# EAGLE board Two stage power demo (EAGLE 5.10)
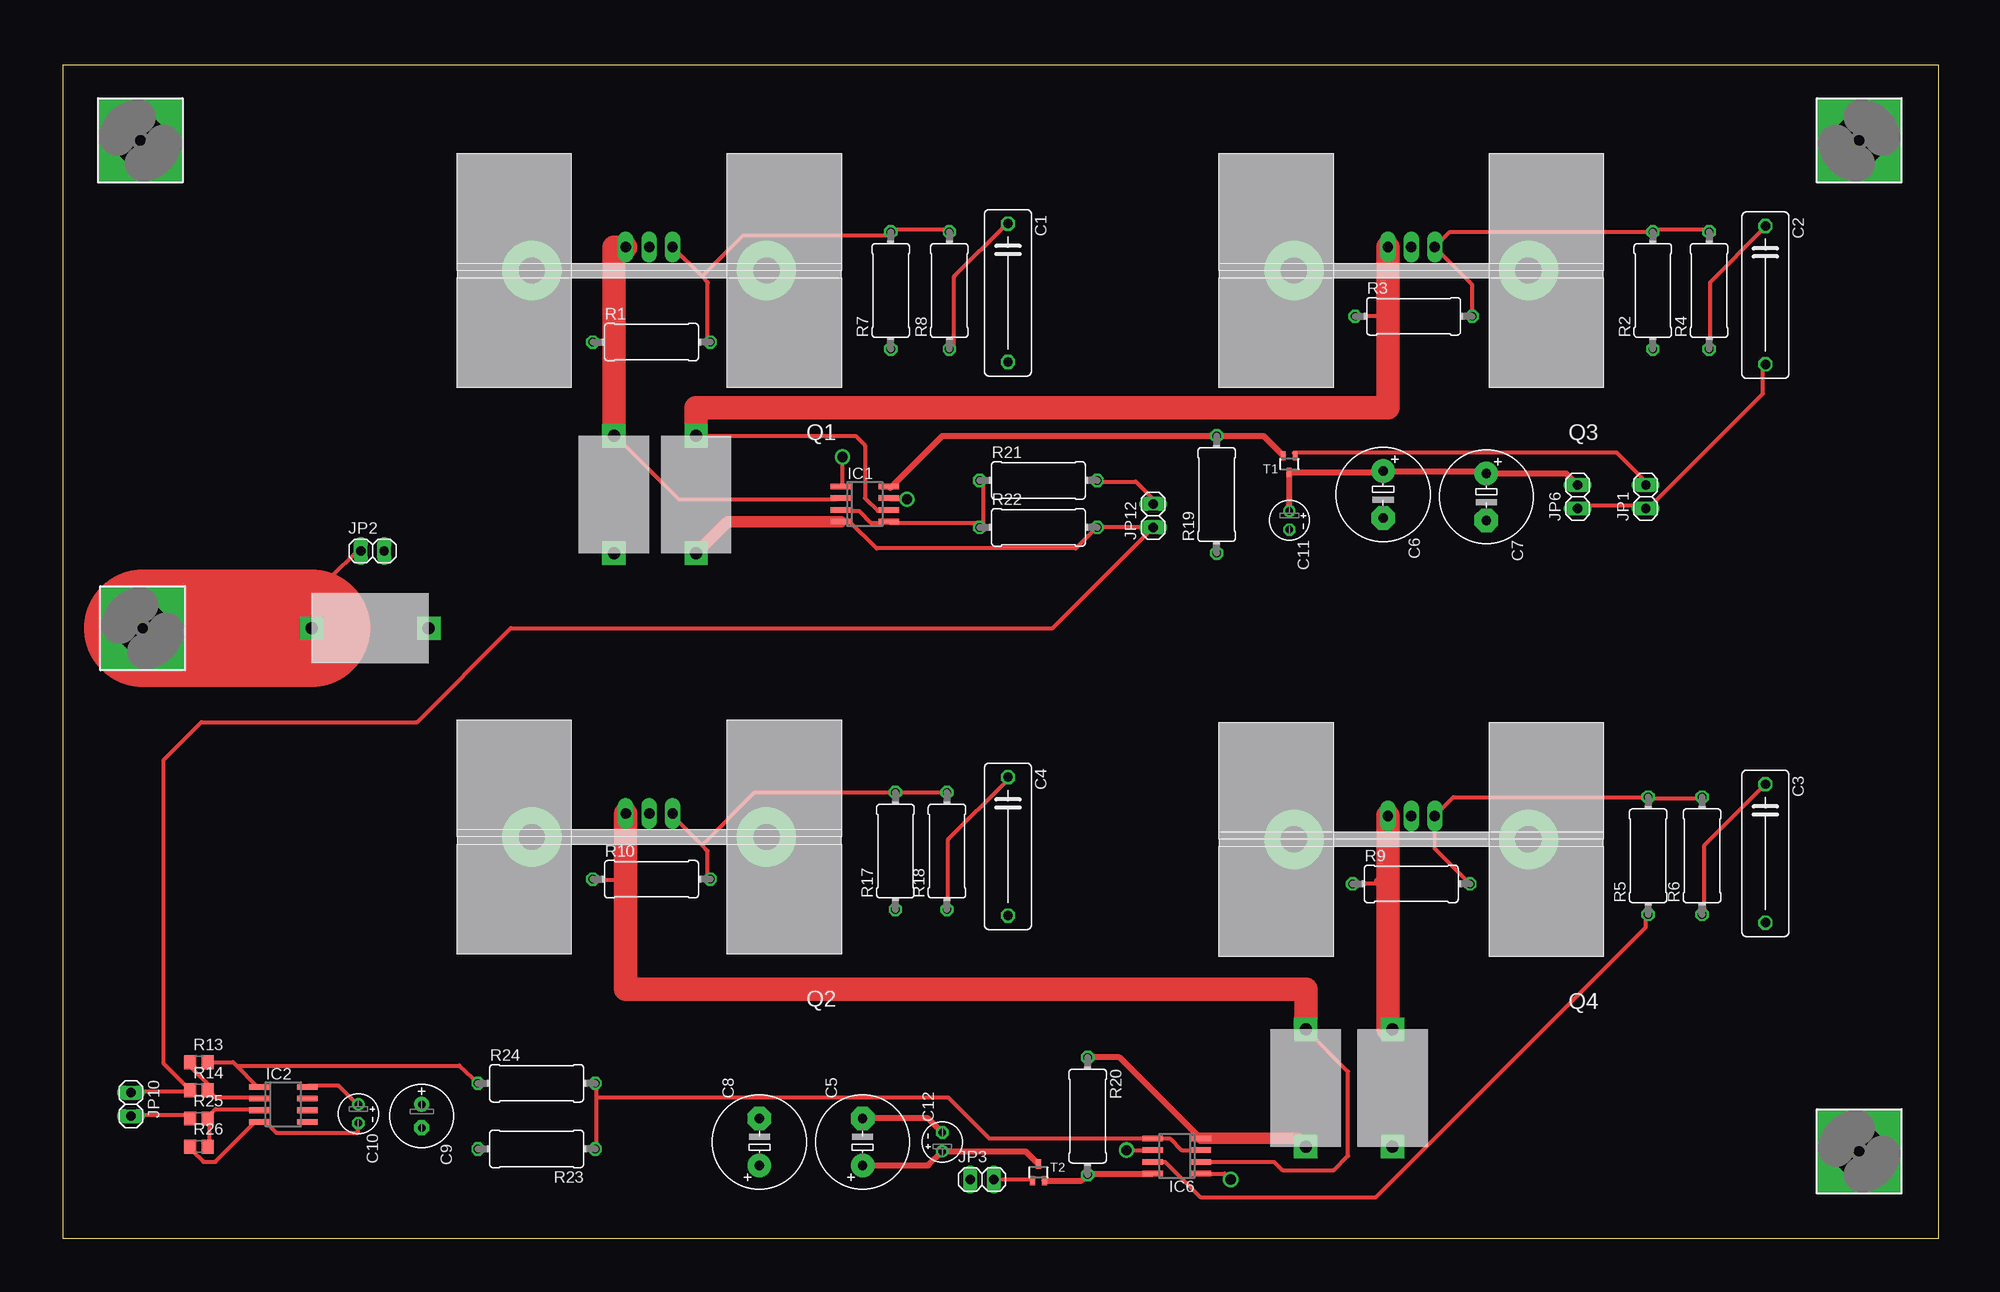
[diagram p0: board, top side]
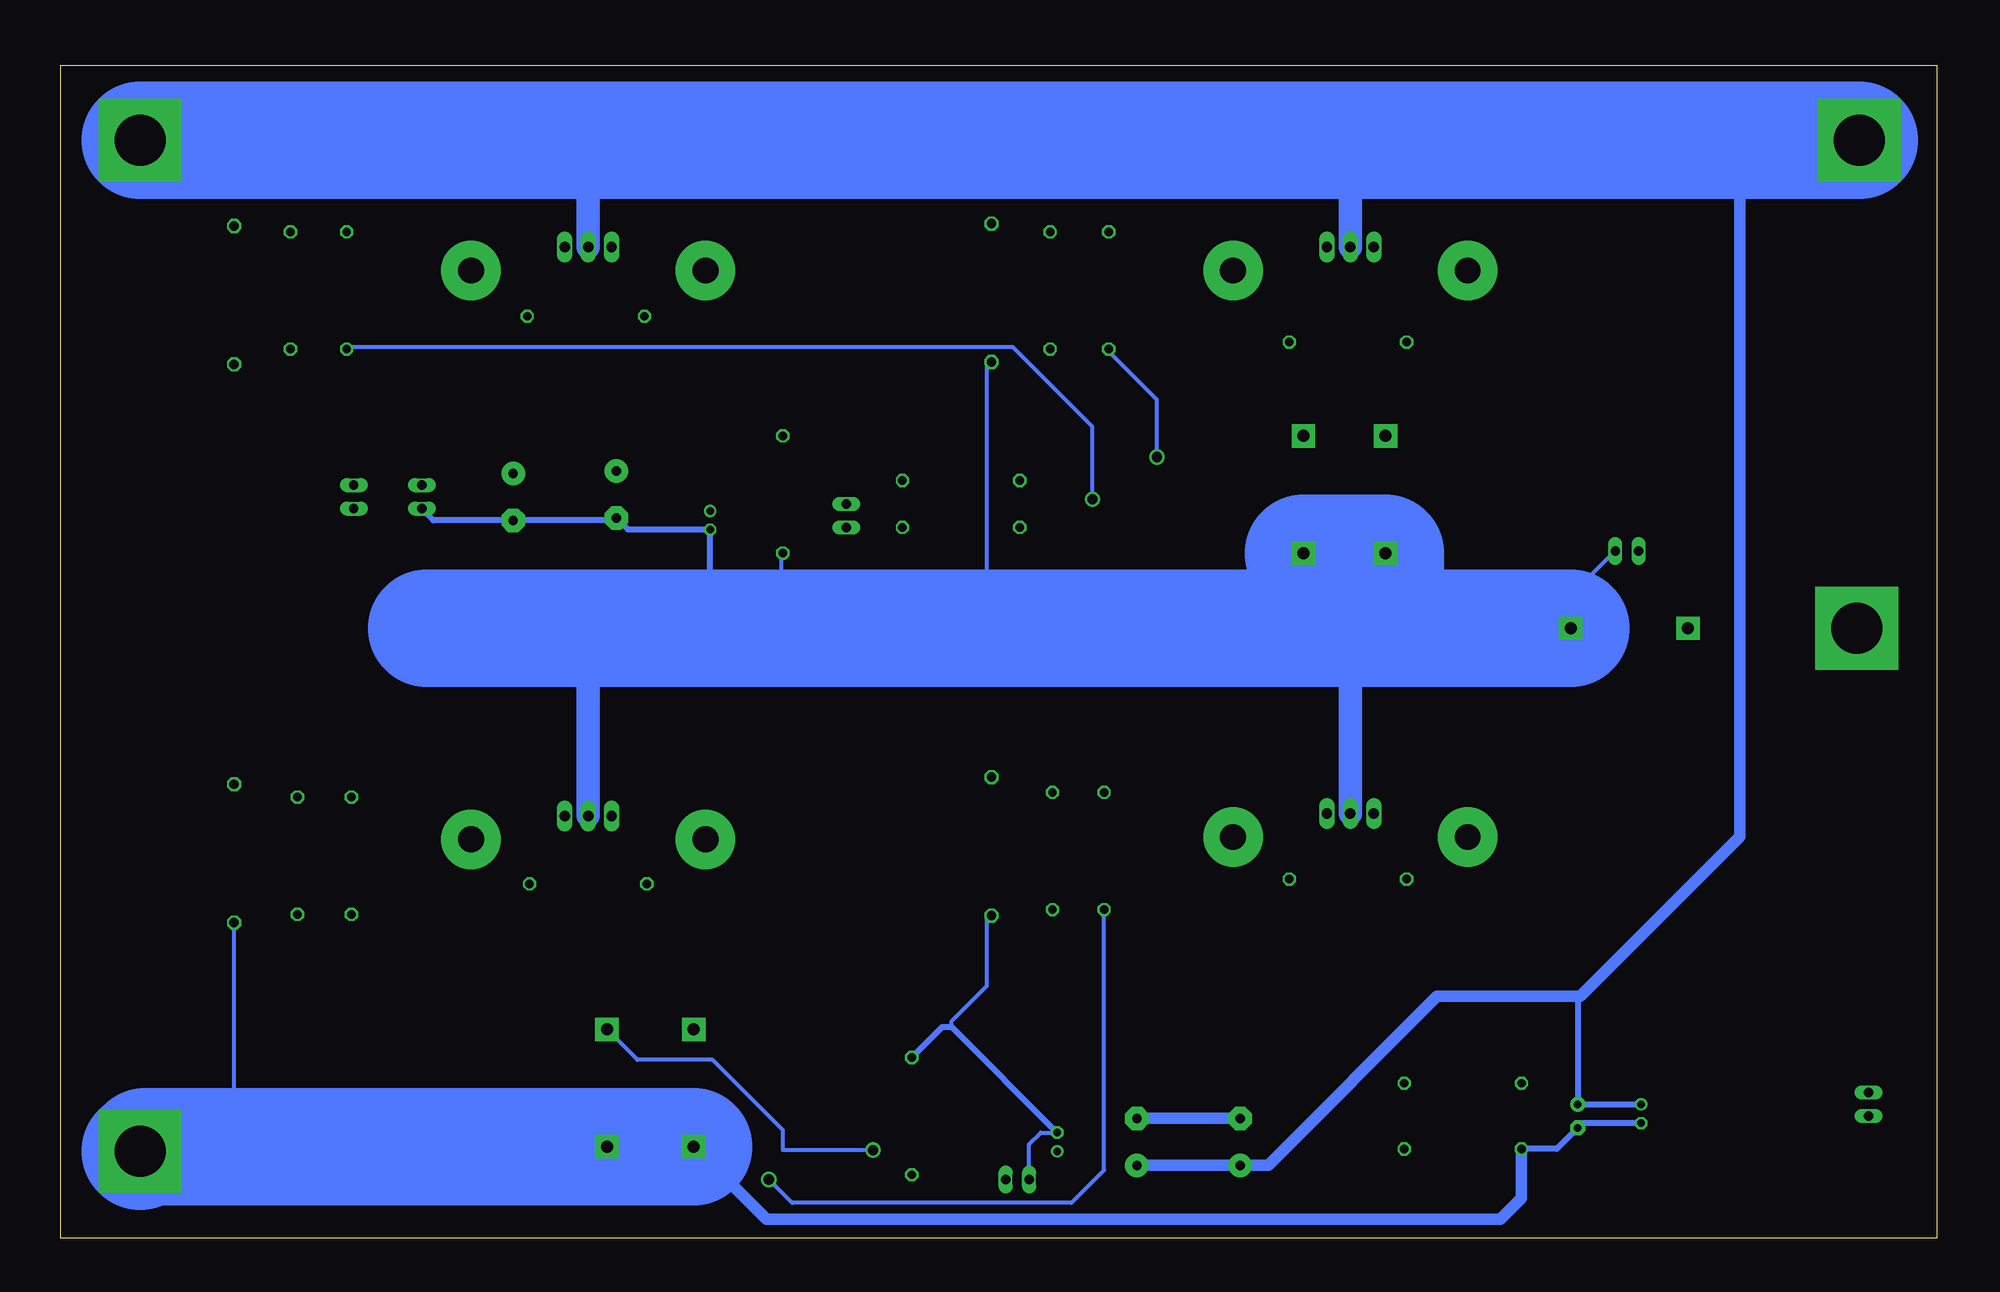
[diagram p1: board, bottom side, seen from below]

Size 203.2 x 127 mm. Coordinates in mm from the lower left corner, seen from the top.
Outline: 0,0 203.2,0 203.2,127 0,127 0,0
Copper layers (1*16): Top 0.035mm / dielectric 1.5mm / Bottom 0.035mm
Design rules "default *": minimum track width 16mil, minimum drill 24mil, track to track 8mil, track to pad 8mil, pad to pad 8mil, via to via 8mil, smd to smd 8mil, copper to edge 40mil, drill to drill 8mil, minimum pad ring 10mil, minimum via ring 8mil, stop-mask expansion 4mil, vias tented up to drill 0mil, thermal gap 10mil

## Footprints (pad centres in the part's own frame; a part is rotated, then mirrored left to right if it is on the bottom)
630HR050E = drill 1.3 pad 2.54 square: P$1 -6.35,0; P$2 6.35,0
5,5-PAD-SQUARE = drill 5.5 pad 9 square: B5,5 0,0
C150-054X183 = drill 1.016 octagon: 1 -7.493,0; 2 7.493,0
E5-10,5 = drill 1.016 pad 2.54 round: + -2.54,0 | drill 1.016 pad 2.54 octagon: - 2.54,0
E2,5-7 = drill 0.813 pad 1.6 round: + -1.27,0 | drill 0.813 pad 1.6 octagon: - 1.27,0
E2-4 = drill 0.813 pad 1.27 round: + -1.016,0 | drill 0.813 pad 1.27 octagon: - 1.016,0
SO08 = smd 0.6 x 2.2: 1 -1.905,-2.6; 2 -0.635,-2.6; 3 0.635,-2.6; 4 1.905,-2.6; 5 1.905,2.6; 6 0.635,2.6; 7 -0.635,2.6; 8 -1.905,2.6
1X02 = drill 1.016 long: 1 -1.27,0; 2 1.27,0
TO220-W/657-20ABP = drill 1.118 long: 1 -2.54,-2.54; 2 0,-2.54; 3 2.54,-2.54 | drill 2.8 pad 6.452 round: P$1 -12.7,0; P$2 12.7,0
0411/12 = drill 0.914 octagon: 1 -6.35,0; 2 6.35,0
R0805 = smd 1.3 x 1.5: 1 -0.95,0; 2 0.95,0
SOT323 = smd 0.5 x 1: 1 0,0.9; 2 -0.65,-0.9; 3 0.65,-0.9

## Placement (x,y rotation side)
1  630HR050E  [630HR050E]  59.69,80.52 90 top
BATTERY-  MOUNT-PAD-SQUARE5.5  [5,5-PAD-SQUARE]  8.64,66.04 90 top
BATTERY/CHARGER+  MOUNT-PAD-SQUARE5.5  [5,5-PAD-SQUARE]  8.38,118.87 90 top
BATTERY/CHARGER+1  MOUNT-PAD-SQUARE5.5  [5,5-PAD-SQUARE]  194.56,118.87 0 top
C1  [C150-054X183]  102.36,102.36 270 top
C2  [C150-054X183]  184.4,102.11 270 top
C3  [C150-054X183]  184.4,41.66 270 top
C4  [C150-054X183]  102.36,42.42 270 top
C5  470u  [E5-10,5]  86.61,10.41 90 top
C6  470u  [E5-10,5]  143,80.52 270 top
C7  470u  [E5-10,5]  154.18,80.26 270 top
C8  470u  [E5-10,5]  75.44,10.41 90 top
C9  100u  [E2,5-7]  38.86,13.21 270 top
C10  0.1u  [E2-4]  32,13.46 270 top
C11  0.1u  [E2-4]  132.84,77.72 270 top
C12  0.1u  [E2-4]  95.25,10.41 90 top
CHARGER-  MOUNT-PAD-SQUARE5.5  [5,5-PAD-SQUARE]  194.56,9.4 90 top
IC1  OPA2277U  [SO08]  86.87,79.5 270 top
IC2  OPA2277U  [SO08]  23.88,14.48 270 top
IC6  OPA2277U  [SO08]  120.65,8.89 90 top
JP1  [1X02]  171.45,80.26 90 top
JP2  [1X02]  33.53,74.42 0 top
JP3  [1X02]  99.57,6.35 0 top
JP6  [1X02]  164.08,80.26 90 top
JP10  [1X02]  7.37,14.48 270 top
JP12  [1X02]  118.11,78.23 90 top
Q1  RFP12N10L  [TO220-W/657-20ABP]  63.5,104.78 180 top
Q2  RFP12N10L  [TO220-W/657-20ABP]  63.5,43.43 180 top
Q3  RFP12N10L  [TO220-W/657-20ABP]  146.05,104.78 180 top
Q4  RFP12N10L  [TO220-W/657-20ABP]  146.05,43.18 180 top
R1  100k  [0411/12]  63.75,97.03 0 top
R2  [0411/12]  172.21,102.62 90 top
R3  100k  [0411/12]  146.3,99.82 0 top
R4  [0411/12]  178.31,102.62 90 top
R5  [0411/12]  171.7,41.4 90 top
R6  [0411/12]  177.55,41.4 90 top
R7  [0411/12]  89.66,102.62 90 top
R8  [0411/12]  96.01,102.62 90 top
R9  100k  [0411/12]  146.05,38.35 0 top
R10  100k  [0411/12]  63.75,38.86 0 top
R13  100k  [R0805]  14.73,19.05 0 top
R14  100k  [R0805]  14.73,16 0 top
R17  [0411/12]  90.17,41.91 90 top
R18  [0411/12]  95.76,41.91 90 top
R19  [0411/12]  124.97,80.52 90 top
R20  [0411/12]  111,13.21 270 top
R21  15k  [0411/12]  105.66,82.04 0 top
R22  1k  [0411/12]  105.66,76.96 0 top
R23  1k  [0411/12]  51.31,9.65 180 top
R24  15k  [0411/12]  51.31,16.76 0 top
R25  100k  [R0805]  14.73,12.95 0 top
R26  100k  [R0805]  14.73,9.91 0 top
T1  [SOT323]  132.84,83.82 180 top
T2  [SOT323]  105.66,7.11 0 top
U$2  630HR050E  [630HR050E]  33.27,66.04 0 top
U$3  630HR050E  [630HR050E]  134.62,16.26 90 top
U$4  630HR050E  [630HR050E]  68.58,80.52 90 top
U$5  630HR050E  [630HR050E]  144.02,16.26 90 top

## Library data of the parts
1 Q1-Q4 U$2-U$5 = NEWPARTS
BATTERY- BATTERY/CHARGER+ BATTERY/CHARGER+1 CHARGER- = holes
C1-C12 R1-R10 R13 R14 R17-R26 = rcl
IC1 IC2 IC6 = linear
JP1-JP3 JP6 JP10 JP12 = pinhead
T1 T2 = zetex

## Nets
+5V: C6.+ C7.+ C11.+ JP6.2 T1.1
GND: 1.P$1 C1.2 C2.2 C6.- C7.- C11.- IC1.4 JP1.1 JP2.2 JP6.1 JP10.1 JP12.1 Q2.2 Q4.2 R14.1 R19.1 R22.2 U$2.P$2 U$4.P$1
LOAD: BATTERY/CHARGER+1.B5,5 BATTERY/CHARGER+.B5,5 C5.+ C8.+ C9.+ C10.+ C12.+ IC2.8 Q1.2 Q3.2 T2.1
N$1: IC1.7 R2.1
N$2: IC6.2 Q2.3 R10.1 U$3.P$2
N$3: C3.2 C4.2 C5.- C8.- C9.- C10.- C12.- CHARGER-.B5,5 IC2.4 IC6.4 JP3.1 R20.1 R23.2 R26.1 U$3.P$1 U$5.P$1
N$4: IC2.2 R13.1 R14.2
N$5: BATTERY-.B5,5 JP2.1 U$2.P$1
N$6: IC1.8 R19.2 T1.3
N$7: JP1.2 T1.2
N$8: IC2.1 R13.2 R24.1
N$9: IC1.6 Q3.3 R3.1 U$4.P$2
N$10: Q1.1 R1.2 R7.2 R8.2
N$11: IC1.3 IC1.5 R21.1 R22.1
N$12: IC6.6 Q4.3 R9.1 U$5.P$2
N$13: C1.1 R8.1
N$14: Q3.1 R2.2 R3.2 R4.2
N$15: C2.1 R4.1
N$16: Q4.1 R5.2 R6.2 R9.2
N$18: C3.1 R6.1
N$19: IC2.3 R25.2 R26.2
N$20: Q2.1 R10.2 R17.2 R18.2
N$21: 1.P$2 IC1.2 Q1.3 R1.1
N$22: C4.1 R18.1
N$23: IC1.1 R7.1
N$25: IC6.7 R5.1
N$26: IC6.1 R17.1
N$27: JP12.2 R21.2
N$28: JP10.2 R25.1
N$29: IC6.8 R20.2 T2.3
N$30: IC6.3 IC6.5 R23.1 R24.2
N$32: JP3.2 T2.2

## Tracks (layer width: path | path; a pad name or v marks a point on that pad's centre or on a via)
+5V
  Top 0.406: T1.1 132.72,83.19
  Top 0.635: C11.+ T1.1 142.86,82.92 C6.+ 153.92,83.06 C7.+ 162.81,82.8 JP6.2
GND
  Top 0.406: JP6.1 164.47,79.38 171.45,79.38 JP1.1 171.45,78.74 184.15,91.44 184.15,94.61 C2.2 | JP10.1 7.62,15.88 13.34,15.88 R14.1 10.92,18.86 10.92,51.82 14.99,55.88 38.35,55.88 48.51,66.04 107.19,66.04 JP12.1 R22.2 109.73,74.68 88.14,74.68 85.22,77.6 IC1.4
  Top 1.27: U$4.P$1 72.01,77.6 IC1.4
  Bottom 0.406: R19.1 125.09,73.66 125.09,66.04 | JP2.2 37.47,71.75 U$2.P$2 | C1.2 102.87,94.61 102.87,66.04 | 163.58,66.04 164.47,71.75
  Bottom 0.635: JP6.1 162.81,77.72 C7.- 143.26,77.72 C6.- 141.73,76.71 C11.- 132.84,71.75 164.47,71.75
  Bottom 12.7: 59.69,66.04 U$2.P$2 | U$4.P$1 1.P$1 59.69,66.04 | 59.69,66.04 63.25,66.04 102.87,66.04 125.09,66.04 154.31,66.04 163.58,66.04
  Bottom 2.54: 154.31,66.04 146.05,66.04 Q4.2 | Q2.2 63.5,66.55 63.25,66.55 63.25,66.04
LOAD
  Top 0.406: IC2.8 26.67,16.51 29.84,16.51 31.75,14.61 C10.+
  Top 0.635: C5.+ 93.73,7.87 C12.+ 104.28,9.4 T2.1
  Bottom 0.406: C10.+ 31.75,14.61
  Bottom 0.635: 39.12,26.16 38.86,25.91 C9.+ C10.+
  Bottom 1.27: 21.08,118.87 21.34,118.62 21.34,43.43 38.61,26.16 39.12,26.16 54.1,26.16 72.39,7.87 C8.+ C5.+
  Bottom 12.7: BATTERY/CHARGER+1.B5,5 145.8,118.87 63.5,118.87 21.08,118.87 BATTERY/CHARGER+.B5,5
  Bottom 2.54: 63.5,118.87 Q1.2 | Q3.2 146.05,123.95 145.8,123.95 145.8,118.87
N$1  (via drill 1.1)
  Top 0.406: v91.44,80.01 89.53,80.01 IC1.7
  Bottom 0.406: R2.1 172.09,96.52 100.08,96.52 91.44,87.88 v91.44,80.01
N$2
  Top 0.406: R10.1 57.78,38.73 60.96,38.73 | IC6.2 131.19,8.26 132.08,7.37 137.67,7.37 139.19,8.89 139.19,18.03 U$3.P$2
  Top 2.54: U$3.P$2 134.62,26.92 60.96,26.92 60.96,38.73 Q2.3
N$3
  Top 0.406: R26.1 13.97,9.53 15.24,8.26 16.51,8.26 20.95,12.7 IC2.4 21.59,12.7 21.84,12.7 23.11,11.43 32,11.43 C10.- | IC6.4 123.19,10.79
  Top 0.635: 123.19,10.79 114.43,19.56 R20.1 | C12.- 93.73,12.95 C5.-
  Top 1.27: IC6.4 133.73,10.79 U$3.P$1
  Bottom 0.406: C4.2 102.87,34.92 102.87,27.3 106.68,23.5 106.68,22.86 | C3.2 184.4,10.67 185.17,9.91 | JP3.1 98.3,10.16 97.03,11.43 C12.-
  Bottom 0.635: C10.- 38.35,12.45 C9.- 41.15,9.65 R23.2 | C12.- 106.68,22.86 107.7,22.86 R20.1
  Bottom 1.27: C5.- C8.- | R23.2 44.96,4.32 47.24,2.03 126.75,2.03 U$3.P$1
  Bottom 12.7: U$3.P$1 U$5.P$1 185.17,9.91 194.06,9.91 CHARGER-.B5,5
N$4
  Top 0.406: R13.1 13.97,19.05 13.97,18.41 15.88,16.51 R14.2 15.88,15.88 16.51,15.24 20.95,15.24 IC2.2
N$5
  Top 0.406: JP2.1 31.75,74.3 29.21,71.75 U$2.P$1
  Top 12.7: BATTERY-.B5,5 U$2.P$1
N$6
  Top 0.406: IC1.8 89.53,81.28 | 124.46,87 R19.2
  Top 0.635: 89.53,81.28 89.66,81.28 95.25,86.87 124.33,86.87 124.46,87 | R19.2 130.04,86.87 T1.3
N$7
  Top 0.406: T1.2 133.35,85.09 168.28,85.09 171.45,81.92 JP1.2
N$8
  Top 0.406: 18.8,18.67 20.95,16.51 IC2.1 | 18.8,18.67 18.41,19.05 R13.2 | 18.8,18.67 42.93,18.67 R24.1
N$9
  Top 0.406: IC1.6 88.9,78.74 88.27,78.74 86.87,80.14 86.87,85.85 85.85,86.87 U$4.P$2 | 143.51,99.82 R3.1
  Top 2.54: U$4.P$2 68.58,89.92 143.51,89.92 143.51,99.82 Q3.3
N$10
  Top 0.406: R8.2 95.89,109.22 90.17,109.22 R7.2 89.53,108.58 73.66,108.58 69.22,104.14 | 69.22,104.14 Q1.1 | 69.22,104.14 69.85,103.5 69.85,97.16 R1.2
N$11
  Top 0.406: IC1.3 84.45,78.74 86.23,78.74 87.5,77.47 88.9,77.47 IC1.5 89.53,77.47 99.06,77.47 R22.1 99.69,77.47 99.69,81.92 R21.1
N$12  (via drill 1.1)
  Top 0.406: v115.19,9.53 IC6.6 | 143.51,38.73 142.75,38.73 | 142.75,38.73 142.24,38.73 | R9.1 142.37,38.35 142.75,38.73
  Top 2.54: Q4.3 143.51,38.73 143.51,22.61 U$5.P$2
  Bottom 0.406: v115.19,9.53 124.97,9.53 124.97,11.68 132.59,19.3 140.72,19.3 U$5.P$2
N$13
  Top 0.406: R8.1 96.52,96.52 96.52,104.14 102.23,109.86 C1.1
N$14
  Top 0.406: R4.2 177.8,109.22 172.72,109.22 R2.2 150.24,108.97 Q3.1 152.65,103.25 R3.2
N$15
  Top 0.406: R4.1 178.44,96.52 178.44,103.5 184.15,109.22 C2.1
N$16
  Top 0.406: R6.2 177.16,47.62 172.09,47.62 R5.2 150.62,47.75 Q4.1 148.59,42.16 R9.2
N$18
  Top 0.406: R6.1 177.8,35.56 177.8,42.55 C3.1
N$19
  Top 0.406: R26.2 15.88,10.16 15.88,12.7 R25.2 15.88,13.34 16.51,13.97 20.95,13.97 IC2.3
N$20
  Top 0.406: R18.2 R17.2 74.93,48.26 69.22,42.55 | 69.22,42.55 66.04,45.72 Q2.1 | 69.22,42.55 69.85,41.91 69.85,39.37 R10.2
N$21
  Top 0.406: IC1.2 83.82,80.01 66.67,80.01 60.33,86.36 1.P$2 | R1.1 57.78,97.16 59.69,97.16
  Top 2.54: Q1.3 59.69,107.31 59.69,97.16 1.P$2
N$22
  Top 0.406: R18.1 95.89,35.56 95.89,43.18 102.23,49.53 C4.1
N$23  (via drill 1.1)
  Top 0.406: v84.45,84.58 84.45,81.28 IC1.1
  Bottom 0.406: v84.45,84.58 84.45,90.81 89.53,95.89 R7.1
N$25
  Top 0.406: IC6.7 119.38,8.26 123.19,4.45 142.24,4.45 171.45,33.66 171.45,34.92 R5.1
N$26  (via drill 1.1)
  Top 0.406: IC6.1 125.86,6.99 v126.49,6.35
  Bottom 0.406: R17.1 90.17,7.37 93.73,3.81 123.95,3.81 v126.49,6.35
N$27
  Top 0.406: R21.2 112.39,81.92 116.2,81.92 118.11,80.01 JP12.2
N$28
  Top 0.406: R25.1 13.34,13.34 7.62,13.34 JP10.2
N$29
  Top 0.406: R20.2 111.12,6.99
  Top 0.635: 111.12,6.99 IC6.8 | T2.3 110.35,6.21 R20.2
N$30
  Top 0.406: IC6.3 121.16,9.53 119.89,10.79 IC6.5 100.33,10.79 95.89,15.24 57.78,15.24 | 57.78,15.24 57.78,16.51 R24.2 | 57.78,15.24 57.78,10.16 R23.1
N$32
  Top 0.406: JP3.2 104.88,6.35 T2.2